# Altium PCB DoorComponantsTest.PcbDoc (part 1 of 2)
Units mil, origin at the board's own origin, x right, y up, seen from the top; angles counter-clockwise.
Board outline 6000 x 4000 mil, 2 copper layers (Top Layer, Bottom Layer); 88 components, 87 nets, 339 pads, 0 vias.
Unrouted connection lines stored in the file: 220.
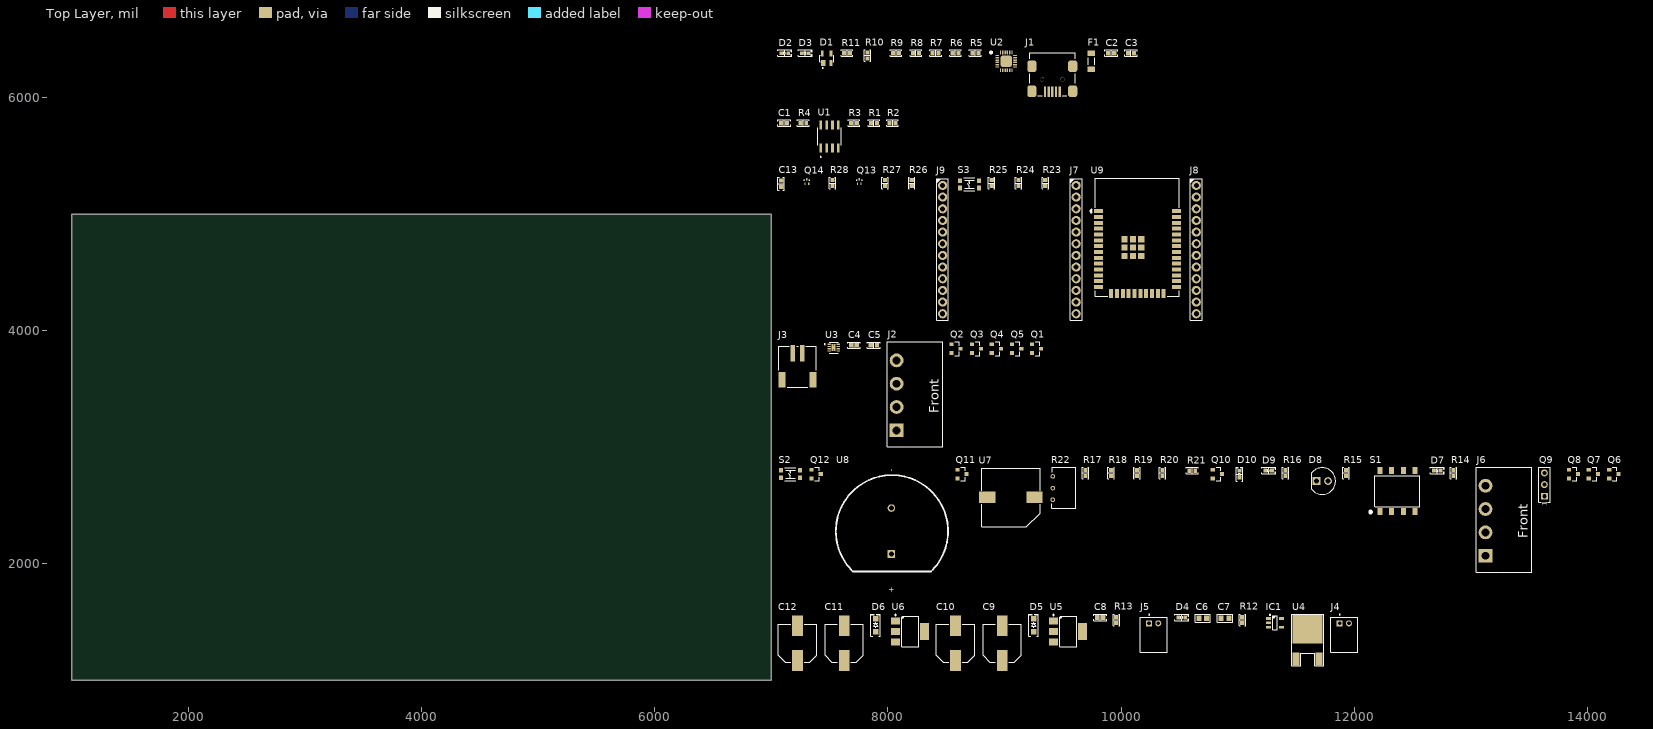
[diagram p0: Top Layer view]
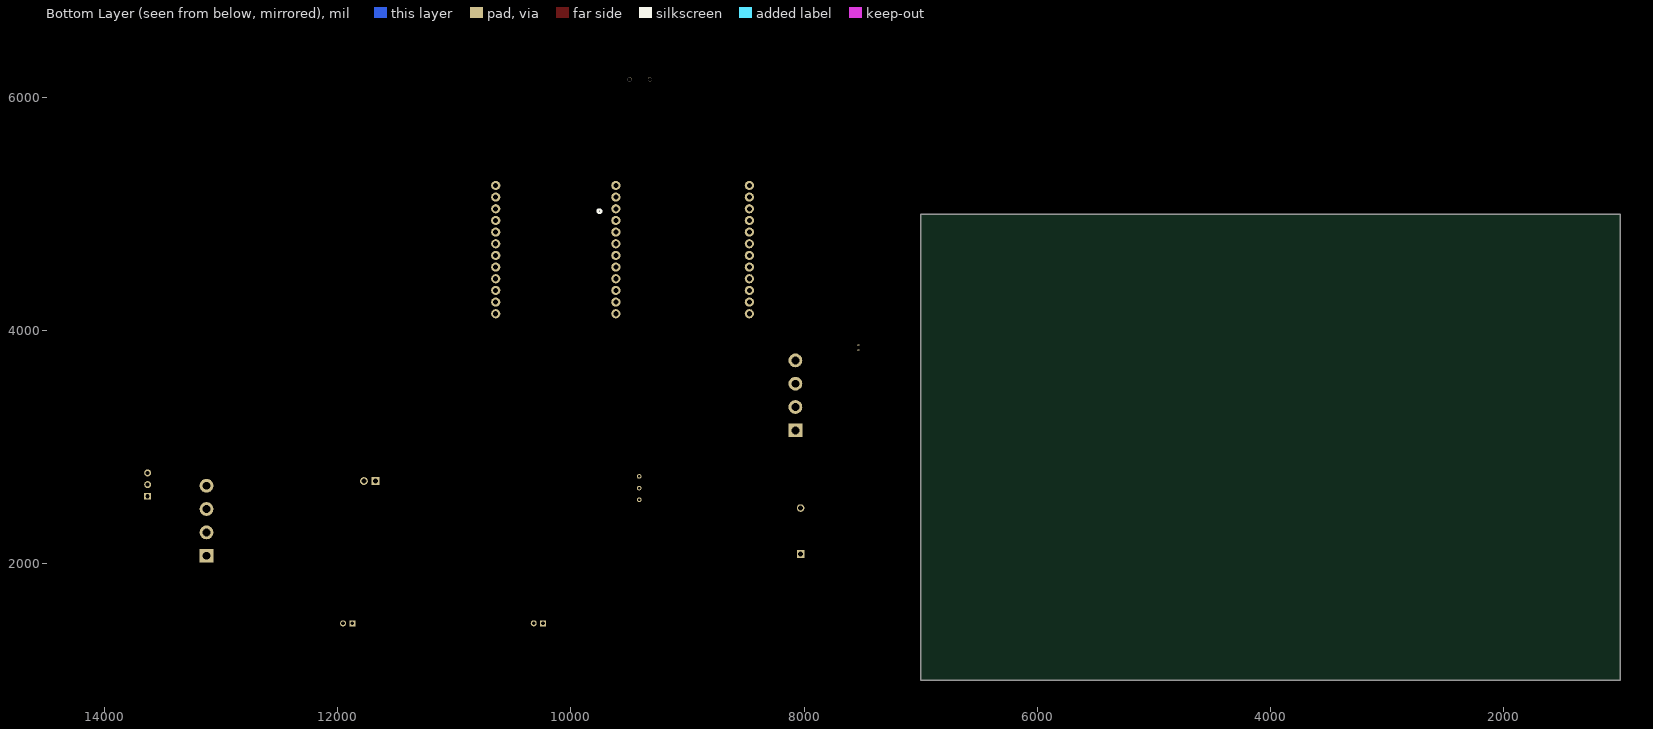
[diagram p1: Bottom Layer view, seen from below]

## Layer stack, top to bottom
Top Solder: solder mask 0.4, Solder Resist, Dk 3.5
Top Layer: signal copper 1.4
Dielectric 1: dielectric 12.6, FR-4, Dk 4.8
Bottom Layer: signal copper 1.4
Bottom Solder: solder mask 0.4, Solder Resist, Dk 3.5

## Board outline
1000,1000 7000,1000 7000,5000 1000,5000

## Design rules (kind name [scope] priority, off if disabled: settings)
Clearance [All] p1: gap=10 ignorepadtopadclearanceinfootprint=FALSE except(0: Arc-Hole Track-Hole SMDPad-Hole THPad-Hole Via-Hole Fill-Hole Poly-Hole Region-Hole Text-Hole)
PolygonConnect [All] p1: connectstyle=Relief reliefconductorwidth=10 reliefentries=4 polygonreliefangle="90 Angle" airgapwidth=10
RoomDefinition USB-UART [InComponentClass('USB-UART')] p1: confinementstyle=ConfineIn formatcopy=TRUE lockcomponents=FALSE outline 7045,5970 10155,5970 10155,6520 7045,6520
RoomDefinition NFC [InComponentClass('NFC')] p2: confinementstyle=ConfineIn formatcopy=TRUE lockcomponents=FALSE outline 7045,5475 8115,5475 8115,5920 7045,5920
RoomDefinition MCU [InComponentClass('MCU')] p3: confinementstyle=ConfineIn formatcopy=TRUE lockcomponents=FALSE outline 7045,4065 10720,4065 10720,5425 7045,5425
RoomDefinition DriveMoteur [InComponentClass('DriveMoteur')] p4: confinementstyle=ConfineIn formatcopy=TRUE lockcomponents=FALSE outline 7045,2995 9345,2995 9345,4015 7045,4015
RoomDefinition "Buzzer, LED, Infrarrouge" [InComponentClass('Buzzer, LED, Infrarrouge')] p5: confinementstyle=ConfineIn formatcopy=TRUE lockcomponents=FALSE outline 7045,1730 14295,1730 14295,2940 7045,2940
RoomDefinition Alimentation [InComponentClass('Alimentation')] p6: confinementstyle=ConfineIn formatcopy=TRUE lockcomponents=FALSE outline 7045,1060 12050,1060 12050,1680 7045,1680
RoutingVias [All] p1: holewidth=28 width=50 viastyle="Through Hole" minholewidth=28 minwidth=50 maxholewidth=28 maxwidth=50
SolderMaskExpansion [All] p1: expansion=4 istentingtop=FALSE
Width [All] p1: maxlimit=10 minlimit=10 preferedwidth=10
30 further rules are at their usual default settings.

## Classes and differential pairs
component class USB-UART: C2 C3 D1 D2 D3 F1 J1 R5 R6 R7 R8 R9 R10 R11 U2
component class NFC: C1 R1 R2 R3 R4 U1
component class MCU: C13 J7 J8 J9 Q13 Q14 R23 R24 R25 R26 R27 R28 R29 S3 U9
component class DriveMoteur: C4 C5 J2 J3 JH1 Q1 Q2 Q3 Q4 Q5 U3
component class "Buzzer, LED, Infrarrouge": D7 D8 D9 D10 J6 JH2 Q6 Q7 Q8 Q9 Q10 Q11 Q12 R14 R15 R16 R17 R18 R19 R20 R21 R22 S1 S2 U7 U8
component class Alimentation: C6 C7 C8 C9 C10 C11 C12 D4 D5 D6 IC1 J4 J5 R12 R13 U4 U5 U6

## Components (designator, comment, footprint, x,y, rotation, side; value= is the part's Value field where it differs from the comment)
C1 "0.1 µF" "CAP 0603_1608" 7110,5780 r0 top
C2 "0.1 µF" "CAP 0603_1608" 9915,6380 r0 top
C3 "0.1 µF" "CAP 0603_1608" 10085,6380 r0 top
C4 "0.1 µF" "CAP 0603_1608" 7710,3875 r0 top
C5 "0.1 µF" "CAP 0603_1608" 7880,3875 r0 top
C6 "1uF 35V" "0603 X7R" 10700,1535 r0 top value=1uF
C7 "1uF 35V" "0603 X7R" 10890,1535 r0 top value=1uF
C8 "10 µF" "CAP 0603_1608" 9820,1540 r0 top
C9 "100 µF" "CAP ALSMD 8.3MM H10.5MM" 8980,1320 r90 top
C10 "100 µF" "CAP ALSMD 8.3MM H10.5MM" 8580,1320 r90 top
C11 "100 µF" "CAP ALSMD 8.3MM H10.5MM" 7625,1320 r90 top
C12 "100 µF" "CAP ALSMD 8.3MM H10.5MM" 7225,1320 r90 top
C13 "0.1 µF" "CAP 0603_1608" 7085,5260 r90 top
D1 "TVS Diode 5.5V" "TVS Diode 5.5V-Footprint-1" 7475,6335 r0 top
D2 "Red" "LED 0603_1608 RED" 7115,6380 r0 top
D3 "Yellow" "LED 0603_1608 YELLOW" 7290,6380 r0 top
D4 "White" "LED 0603_1608" 10520,1540 r0 top
D5 "1N4007FLTR" SOD123F 9250,1475 r90 top
D6 "1N4007FLTR" SOD123F 7895,1475 r90 top
D7 "Red" "LED 0603_1608 RED" 12710,2800 r0 top
D8 "TSAL6100" TSAL6100 11725,2710 r0 top
D9 "Green" "LED 0603_1608 GREEN" 11265,2800 r0 top
D10 "Blue" "LED 0603_1608 BLUE" 11015,2770 r90 top
F1 "Fuse 500mA" "FUSE 1206_3216 0.6MM" 9745,6310 r90 top
IC1 "MCP73831T-2ATI/OT" "MICROCHIP SOT-23-5 OT" 11320,1495 r0 top
J1 "10033526-N3212LF" "FCI USB 10033526-N3212LF" 9410,6200 r0 top
J2 "CONN 4P 5mm HDR" "CONN 4P 5mm HDR-Footprint-1" 8075,3145 r90 top
J3 "S2B-PH-SM4-TB(LF)(SN)" S2B-PH-SM4-TB_LF__SN 7225,3690 r0 top
J4 "JST 2P 2mm R/A" "JST 2P 2mm R_A-Footprint-1" 11875,1490 r0 top
J5 "JST 2P 2mm R/A" "JST 2P 2mm R_A-Footprint-1" 10240,1490 r0 top
J6 "CONN 4P 5mm HDR" "CONN 4P 5mm HDR-Footprint-1" 13125,2070 r90 top
J7 "M20-7821242" "HARWIN M20-7821245" 9615,4695 r0 top
J8 "M20-7821242" "HARWIN M20-7821245" 10645,4695 r0 top
J9 "M20-7821242" "HARWIN M20-7821245" 8470,4695 r0 top
Q1 "TRANS N-CHANNEL 30V 5.8A SOT23" SOT-23 9275,3845 r0 top
Q2 "TRANS N-CHANNEL 30V 5.8A SOT23" SOT-23 8585,3845 r0 top
Q3 "TRANS N-CHANNEL 30V 5.8A SOT23" SOT-23 8760,3845 r0 top
Q4 "TRANS N-CHANNEL 30V 5.8A SOT23" SOT-23 8930,3845 r0 top
Q5 "TRANS N-CHANNEL 30V 5.8A SOT23" SOT-23 9105,3845 r0 top
Q6 "TRANS N-CHANNEL 30V 5.8A SOT23" SOT-23 14225,2770 r0 top
Q7 "TRANS N-CHANNEL 30V 5.8A SOT23" SOT-23 14050,2770 r0 top
Q8 "TRANS N-CHANNEL 30V 5.8A SOT23" SOT-23 13880,2770 r0 top
Q9 "IR Sensor TSOP38338" "Header 1x3 100 mils" 13630,2580 r90 top
Q10 "TRANS N-CHANNEL 30V 5.8A SOT23" SOT-23 10825,2770 r0 top
Q11 "TRANS N-CHANNEL 30V 5.8A SOT23" SOT-23 8635,2770 r0 top
Q12 "TRANS N-CHANNEL 30V 5.8A SOT23" SOT-23 7385,2770 r0 top
Q13 "MMBT2222AM3T5G" "ON SEMI SOT-723" 7755,5280 r90 top
Q14 "MMBT2222AM3T5G" "ON SEMI SOT-723" 7305,5280 r90 top
R1 "4.7 kOhms" "RES 0603_1608" 7880,5780 r0 top
R2 "1 kOhms" "RES 0603_1608" 8040,5780 r0 top
R3 "1 kOhms" "RES 0603_1608" 7710,5780 r0 top
R4 "4.7 kOhms" "RES 0603_1608" 7275,5780 r0 top
R5 "1 kOhms" "RES 0603_1608" 8750,6380 r0 top
R6 "22.1 kOhms" "RES 0603_1608" 8580,6380 r0 top
R7 "NA" "RES 0603_1608" 8410,6380 r0 top
R8 "1 kOhms" "RES 0603_1608" 8240,6380 r0 top
R9 "1 kOhms" "RES 0603_1608" 8070,6380 r0 top
R10 "NA" "RES 0603_1608" 7825,6360 r90 top
R11 "47 kOhms" "RES 0603_1608" 7650,6380 r0 top
R12 "1 kOhms" "RES 0603_1608" 11040,1520 r90 top
R13 "4.7 kOhms" "RES 0603_1608" 9960,1520 r90 top
R14 "470 Ohms" "RES 0603_1608" 12850,2780 r90 top
R15 "470 Ohms" "RES 0603_1608" 11930,2780 r90 top
R16 "470 Ohms" "RES 0603_1608" 11410,2780 r90 top
R17 "10 kOhms" "RES 0603_1608" 9695,2780 r90 top
R18 "10 kOhms" "RES 0603_1608" 9915,2780 r90 top
R19 "NA" "RES 0603_1608" 10135,2780 r90 top
R20 "NA" "RES 0603_1608" 10355,2780 r90 top
R21 "NA" "RES 0603_1608" 10610,2800 r0 top
R22 "POT 10K" POT_TH 9415,2650 r90 top value=10K
R23 "100 kOhms" "RES 0603_1608" 9350,5265 r90 top
R24 "10 kOhms" "RES 0603_1608" 9120,5265 r90 top
R25 "100 kOhms" "RES 0603_1608" 8890,5265 r90 top
R26 "NA" "RES 0603_1608" 8205,5265 r90 top
R27 "10 kOhms" "RES 0603_1608" 7975,5265 r90 top
R28 "10 kOhms" "RES 0603_1608" 7525,5265 r90 top
S1 "Dip Switch 4P" "DIP SWITCH, SPST, 2.54 PITCH, FL" 12220,2450 r0 top
S2 "KMR741NG ULC LFS" "C&K KMR7" 7165,2770 r0 top
S3 "KMR741NG ULC LFS" "C&K KMR7" 8700,5255 r0 top
U1 "M24SR64-YMN6T/2" SOIC127P600X175-8N 7500,5665 r90 top
U2 "USB-UART CP2102N" "CP2102N USB-UART" 9015,6310 r0 top
U3 "DRV8837CDSGT" SON50P200X200X80-9N 7535,3855 r0 top
U4 "LDO 5V 1.5A" "LDO 5V 1.5A" 11600,1440 r0 top
U5 "LD1117S33TR" "ST SOT-223" 9545,1420 r0 top
U6 "LD1117S33TR" "ST SOT-223" 8190,1420 r0 top
U7 "CT-1205H-SMT-TR" "CUI CT-1205H-SMT-TR" 9055,2570 r0 top
U8 "Buzzer CEP-1112" "Buzzer CEP-1112-Footprint-1" 8030,2085 r90 top
U9 "ESP32-WROOM-32 (8MB)" "IC38_ESP32-WROOM-32 (8MB)_EXP" 10140,4800 r0 top

## Footprints (in the part's own frame and the unit in brackets; to place one, negate y for a bottom-side part, rotate by r counter-clockwise, add the part's x,y. Pads: shape width x height; smd on the part's side, far side on the other; paste and mask are expansions set on the pad)
"0603 X7R" [mm]
  rect 1.1x1.2 smd: 1(-0.855,0) 2(0.855,0)
  silkscreen extent -1.68,-0.87 1.68,0.87, body extent -0.85,-0.46 0.85,0.46, height 0.89
"Buzzer CEP-1112-Footprint-1" [mm]
  round 1.65 hole 1.1: N(10,0)
  rect 1.65x1.65 hole 1.1: P(0,0)
  silkscreen extent -3.81,-12.34 17.16,12.09, body extent -6.92,-12 17.08,12, height 6.8
"C&K KMR7" [mm] "T-Switch, 4-leads, body 4.2x2.8mm, C&K KMR741NG ULC LFS"
  rect 0.9x1 smd mask+0.1: 1(-2.05,0.8) 2(2.05,0.8) 3(-2.05,-0.8) 4(2.05,-0.8)
  silkscreen extent -1.2,-1.4 1.2,1.4, body extent -2.3,-1.4 2.3,1.4, height 2.5
"CAP 0603_1608" [mm] "Chip Capacitor, 2-Leads, Body 1.60x0.80mm, IPC Medium Density"
  rect 0.9x1 smd: 1(-0.675,0) 2(0.675,0)
  silkscreen extent -1.4,-0.7 1.4,0.7, body extent -0.8,-0.41 0.8,0.41, height 0.82
"CAP ALSMD 8.3MM H10.5MM" [mm] "Aluminum Electrolytic Capacitor, Body 8.30x8.30x10.50mm, IPC Low Density"
  rect 4.55x2.3 smd: 1(-3.8,0) 2(3.8,0)
  silkscreen extent -4.15,-4.15 4.15,4.15, body extent -4.95,-4.15 4.95,4.15, height 10.5
"CONN 4P 5mm HDR-Footprint-1" [mm]
  rect 3x3 hole 1.7: 1(0,0)
  round 3 hole 1.7: 2(5.08,0) 3(10.16,0) 4(15.24,0)
  silkscreen extent -3.56,-10.03 19.3,2.03, body extent -3.56,-10.03 19.3,2.03, height 8.5
"CP2102N USB-UART" [mm]
  rect 0.85x0.3 smd: 1(-1.95,1.25)
  rrect50% 0.85x0.3 smd: 2(-1.95,0.75) 3(-1.95,0.25) 4(-1.95,-0.25) 5(-1.95,-0.75) 6(-1.95,-1.25) 13(1.95,-1.25) 14(1.95,-0.75) 15(1.95,-0.25) 16(1.95,0.25) 17(1.95,0.75) 18(1.95,1.25)
  rrect50% 0.3x0.85 smd: 7(-1.25,-1.95) 8(-0.75,-1.95) 9(-0.25,-1.95) 10(0.25,-1.95) 11(0.75,-1.95) 12(1.25,-1.95) 19(1.25,1.95) 20(0.75,1.95) 21(0.25,1.95) 22(-0.25,1.95) 23(-0.75,1.95) 24(-1.25,1.95)
  rrect50% 2.55x2.55 smd: 25(0,0)
  silkscreen extent -3.43,1.78 -3.17,2.03, body extent -2,-2 2,2, height 0.8
"CUI CT-1205H-SMT-TR" [mm] "Buzzer 12.8x12.8mm"
  rect 3.5x2.5 smd: +(-5.15,0) -(5.15,0)
  silkscreen extent -6.4,-6.4 6.4,6.4, body extent -6.9,-6.4 6.9,6.4, height 10
"DIP SWITCH, SPST, 2.54 PITCH, FL" [mm]
  rect 1.1x1.5 smd: 1(0,0) 2(2.54,0) 3(5.08,0) 4(7.62,0) 5(7.62,8.9) 6(5.08,8.9) 7(2.54,8.9) 8(0,8.9)
  silkscreen extent -2.16,-0.25 8.68,7.73, body extent -1.64,-0.63 9.52,9.27, height 3.99
"FCI USB 10033526-N3212LF" [mm] "USB 2.0 Type B Mini"
  rect 0.5x2.25 smd: 1(1.6,-3.826) 2(0.8,-3.826) 3(0,-3.826) 4(-0.8,-3.826) 5(-1.6,-3.826)
  round 0.9 hole 0.9 unplated: M(-2.2,-1.151) M(2.2,-1.151)
  rrect50% 2x2.5 smd: S(-4.45,-3.731) S(-4.45,1.719) S(4.45,-3.731) S(4.45,1.719)
  silkscreen extent -4.95,-4.71 4.95,4.69, body extent -4.95,-4.7 4.95,4.7, height 4.01
"FUSE 1206_3216 0.6MM" [mm] "Chip Fuse 1.5A AC 63V DC, 2-Leads, Body 3.10x1.55mm, IPC Medium Densitym"
  rect 1.25x1.65 smd: 1(-1.725,0) 2(1.725,0)
  silkscreen extent -0.8,-0.72 0.8,0.72, body extent -1.55,-0.77 1.55,0.78, height 0.76
"HARWIN M20-7821245" [mm] "2.54mm DIL PC TAIL PIN HEADER ASSEMBLY"
  round 2 hole 1.1: 1(0,13.97) 2(0,11.43) 3(0,8.89) 4(0,6.35) 5(0,3.81) 6(0,1.27) 7(0,-1.27) 8(0,-3.81) 9(0,-6.35) 10(0,-8.89) 11(0,-11.43) 12(0,-13.97)
  silkscreen extent -1.27,-15.4 1.27,15.43, body extent -1.25,-15.44 1.25,15.44, height 8.5
"Header 1x3 100 mils" [mm]
  rect 1.5x1.5 hole 0.9: 1(0,0)
  round 1.5 hole 0.9: 2(2.54,0) 3(5.08,0)
  silkscreen extent -1.27,-1.27 6.35,1.27, body extent -0.38,-3.4 5.4,1.4, height 10.16
"IC38_ESP32-WROOM-32 (8MB)_EXP" [mil]
  rect 79x35 smd paste+0 mask+0: 1(-334.65,224.56) 2(-334.65,174.56) 3(-334.65,124.56) 4(-334.65,74.56) 5(-334.65,24.56) 6(-334.65,-25.44) 7(-334.65,-75.44) 8(-334.65,-125.44) 9(-334.65,-175.44) 10(-334.65,-225.44) 11(-334.65,-275.44) 12(-334.65,-325.44) 13(-334.65,-375.44) 14(-334.65,-425.44) 25(334.65,-425.44) 26(334.65,-375.44) 27(334.65,-325.44) 28(334.65,-275.44) 29(334.65,-225.44) 30(334.65,-175.44) 31(334.65,-125.44) 32(334.65,-75.44) 33(334.65,-25.44) 34(334.65,24.56) 35(334.65,74.56) 36(334.65,124.56) 37(334.65,174.56) 38(334.65,224.56)
  rect 35x79 smd: 15(-225,-482.19) 16(-175,-482.19) 17(-125,-482.19) 18(-75,-482.19) 19(-25,-482.19) 20(25,-482.19) 21(75,-482.19) 22(125,-482.19) 23(175,-482.19) 24(225,-482.19)
  rect 52x52 smd: 39(-111.78,-15.96) 40(-39.54,-15.96) 41(32.71,-15.96) 42(-111.78,-88.2) 43(-39.54,-88.2) 44(32.71,-88.2) 45(-111.78,-160.44) 46(-39.54,-160.44) 47(32.71,-160.44)
  silkscreen extent -400,-507 360,507, body extent 0,0 10,10, height 10
"JST 2P 2mm R_A-Footprint-1" [mm]
  rect 1.308x1.308 / inner round 1.308 / far side rect 1.308x1.308 hole 0.8: 1(0,0)
  round 1.308 hole 0.8: 2(2,0)
  silkscreen extent -1.95,-6.25 3.95,2, body extent -1.95,-6.22 3.95,1.38, height 4.8
"LDO 5V 1.5A" [mm] "IC REG LINEAR 5V 1.5A DPAK"
  rect 1.5x2.8 smd: 1(-2.5,-6.5) 3(2.5,-6.5)
  rect 6.5x6.2 smd: 2(0,0)
  silkscreen extent -3.5,-8 3.5,3.25
"LED 0603_1608" [mm] "Chip Diode, 2-Leads, Body 1.60x0.80mm, IPC Medium Density"
  rect 0.8x0.8 smd: 1(-0.75,0) 2(0.75,0)
  silkscreen extent -1.52,-0.7 1.52,0.7, body extent -0.8,-0.4 0.8,0.4, height 0.53
"LED 0603_1608 BLUE" [mm] "Chip Diode, 2-Leads, Body 1.60x0.80mm, IPC Medium Density"
  rect 0.8x0.8 smd: 1(-0.75,0) 2(0.75,0)
  silkscreen extent -1.52,-0.7 1.52,0.7, body extent -0.8,-0.4 0.8,0.4, height 0.53
"LED 0603_1608 GREEN" [mm] "Chip Diode, 2-Leads, Body 1.60x0.80mm, IPC Medium Density"
  rect 0.8x0.8 smd: 1(-0.75,0) 2(0.75,0)
  silkscreen extent -1.52,-0.7 1.52,0.7, body extent -0.8,-0.4 0.8,0.4, height 0.53
"LED 0603_1608 RED" [mm] "Chip Diode, 2-Leads, Body 1.60x0.80mm, IPC Medium Density"
  rect 0.8x0.8 smd: 1(-0.75,0) 2(0.75,0)
  silkscreen extent -1.52,-0.7 1.52,0.7, body extent -0.8,-0.4 0.8,0.4, height 0.53
"LED 0603_1608 YELLOW" [mm] "Chip Diode, 2-Leads, Body 1.60x0.80mm, IPC Medium Density"
  rect 0.8x0.8 smd: 1(-0.75,0) 2(0.75,0)
  silkscreen extent -1.52,-0.7 1.52,0.7, body extent -0.8,-0.4 0.8,0.4, height 0.53
"MICROCHIP SOT-23-5 OT" [mm] "SOT23, 5-Leads, Body 2.90x2.70mm, Pitch 0.95mm, IPC Medium Density"
  rect 1.1x0.6 smd: 1(-1.4,0.95) 2(-1.4,0) 3(-1.4,-0.95) 4(1.4,-0.95) 5(1.4,0.95)
  silkscreen extent -1.22,-1.5 0.5,1.85, body extent -1.36,-1.45 1.36,1.45, height 1.19
"ON SEMI SOT-723" [mm] "SOT-723, 3-Leads, Body 0.8x1.20mm, Pitch 0.40mm, IPC Medium Density"
  rect 0.52x0.27 smd: 1(-0.49,0.4) 3(-0.49,-0.4)
  rect 0.52x0.36 smd: 2(0.49,0)
  silkscreen extent 0.1,-0.6 0.4,0.6, body extent -0.6,-0.6 0.6,0.6, height 0.55
POT_TH [mm] "Bourns 3352"
  round 1 hole 0.55: 1(-2.54,0) 2(0,0) 3(2.54,0)
  silkscreen extent -4.37,-4.97 4.51,0.27, body extent -4.36,-4.98 4.52,0.22, height 9.65
"RES 0603_1608" [mm] "Chip Resistor, 2-Leads, Body 1.60x0.80mm, IPC Medium Density"
  rect 0.85x0.95 smd: 1(-0.65,0) 2(0.65,0)
  silkscreen extent -1.27,-0.7 1.27,0.7, body extent -0.8,-0.4 0.8,0.4, height 0.45
S2B-PH-SM4-TB_LF__SN [mil]
  rect 39x138 smd paste+0 mask+0: 1(-39.37,116.35) 2(39.37,116.35)
  rect 59x134 smd: 3(-131.89,-110.03) 4(131.89,-110.03)
  silkscreen extent -160,-174 160,174, body extent 0,0 10,10, height 10
SOD123F [mm] "SODFL, 2-Leads, Body 1.60x3.50mm, IPC Medium Density"
  rect 1.2x1.2 smd: 1(-1.43,0) 2(1.43,0)
  silkscreen extent -2.41,-1.02 2.41,1.02, body extent -1.75,-0.8 1.75,0.8, height 1.1
SOIC127P600X175-8N [mm]
  rrect25% 1.97x0.6 smd: 1(-2.475,1.905) 2(-2.475,0.635) 3(-2.475,-0.635) 4(-2.475,-1.905) 5(2.475,-1.905) 6(2.475,-0.635) 7(2.475,0.635) 8(2.475,1.905)
  silkscreen extent -4.54,-2.52 1.95,2.52, body extent -3,-2.45 3,2.45, height 1.75
SON50P200X200X80-9N [mm]
  rrect25% 0.74x0.28 smd: 1(-0.985,0.75) 2(-0.985,0.25) 3(-0.985,-0.25) 4(-0.985,-0.75) 5(0.985,-0.75) 6(0.985,-0.25) 7(0.985,0.25) 8(0.985,0.75)
  rect 0.9x1.6 smd paste-2: 9(0,0)
  round 0.4 hole 0.2 mask+0: 9_1(0,0.55) 9_2(0,-0.55)
  silkscreen extent -2.02,-1.21 1,1.21, body extent -1,-1 1,1, height 0.8
SOT-23 [mm]
  rect 0.9x0.8 smd: 1(-1,0.95) 2(-1,-0.95) 3(1,0)
  silkscreen extent -0.28,-1.5 0.7,1.5, body extent -0.7,-1.52 0.7,1.52, height 1.12
"ST SOT-223" [mm] "SOT223, 4-Leads, Body 6.50x7.00mm (avg), Pitch 2.30mm, IPC Medium Density"
  rect 2x1.5 smd: 1(-3.15,2.3) 2(-3.15,0) 3(-3.15,-2.3)
  rect 2x3.8 smd: 4(3.15,0)
  silkscreen extent -3.27,-3.35 1.85,3.72, body extent -3.52,-3.25 3.5,3.25, height 1.8
TSAL6100 [mm]
  rect 1.7x1.7 hole 1.1 paste-1000 mask+0: 1(-1.27,0)
  round 1.7 hole 1.1 paste-1000 mask+0: 2(1.27,0)
  silkscreen extent -2.29,-2.9 2.9,2.9, body extent -3.08,-3.08 3.08,3.08, height 0.25
"TVS Diode 5.5V-Footprint-1" [mm]
  rrect15% 0.99x1.3 smd: 1(-0.76,-1.025)
  rrect15% 0.59x1.3 smd: 2(0.96,-1.025) 3(0.96,1.025) 4(-0.96,1.025)
  silkscreen extent -1.52,-2.2 1.52,0.7, body extent -1.46,-1.18 1.46,1.19, height 1.22

## Part data
C1 C2 C3 C4 C5 C13: library part C0603C104K5RAC7411, "CAP CER 0.1UF 50V X7R 0603", Device Package="0603 (1608 Metric)", manufacturer=KEMET, Operating Temperature="-55°C ~ 125°C", Supplier Part Number 1=399-C0603C104K5RAC7411CT-ND, Temperature Coefficient=X7R, Tolerance=±10%, Voltage - Rated=50V, Applications="Bypass, Decoupling", Capacitance="0.1 µF", componentlink1description=Datasheet, componentlink1url=https://api.kemet.com/component-edge/download/datasheet/C0603C104K5RAC7411.pdf, componentlink2description="DigiKey Link", componentlink2url=https://www.digikey.com/en/products/detail/kemet/C0603C104K5RAC7411/3317013, lastupdated="2023-03-28 19:09:05", Lifecycle Status=Active, Minimum Order=1, Mounting Type="Surface Mount, MLCC", Package / Case="0603 (1608 Metric)", packaging=TapeAndReel, Part Number=C0603C104K5RAC7411, Part Status=Active, partid=2233, price=0.01, series="SMD Comm X7R", Size / Dimension="0.063\" L x 0.031\" W (1.60mm x 0.80mm)", Supplier 1=DigiKey, Thickness (Max)="0.035\" (0.90mm)"
C6 C7: library part CMP-048-000033-3, "1µF ±10% 35V Ceramic Capacitor X7R 0603 (1608 Metric)", manufacturer="Taiyo Yuden", Manufacturer Part Number=GMJ107CB7105MAHR, Volt=35V, Design Item ID="1uF 35V X7R", Source=IC_Cap.SchLib, Tri=1000000, Verifier="Maxim Ayotte"
C8: library part GRT188R61C106ME13D, "CAP CER 10UF 16V X5R 0603", Device Package="0603 (1608 Metric)", manufacturer="Murata Electronics", Operating Temperature="-55°C ~ 85°C", Ratings=AEC-Q200, Supplier Part Number 1=490-12318-1-ND, Temperature Coefficient=X5R, Tolerance=±20%, Voltage - Rated=16V, Applications=Automotive, Capacitance="10 µF", componentlink1description=Datasheet, componentlink1url=https://search.murata.co.jp/Ceramy/image/img/A01X/G101/ENG/GRT188R61C106ME13-01.pdf, componentlink2description="DigiKey Link", componentlink2url=https://www.digikey.com/en/products/detail/murata-electronics/GRT188R61C106ME13D/5416740, lastupdated="2023-03-28 19:09:04", Lifecycle Status=Active, Minimum Order=1, Mounting Type="Surface Mount, MLCC", Package / Case="0603 (1608 Metric)", packaging=TapeAndReel, Part Number=GRT188R61C106ME13D, Part Status=Active, partid=2515, price=0.06, series=GRT, Size / Dimension="0.063\" L x 0.031\" W (1.60mm x 0.80mm)", Supplier 1=DigiKey, Thickness (Max)="0.035\" (0.90mm)"
C9 C10 C11 C12: library part UCD1V101MNL1GS, "CAP ALUM 100UF 20% 35V SMD", Device Package="Radial, Can - SMD", Lifetime @ Temp.="5000 Hrs @ 105°C", manufacturer=Nichicon, Operating Temperature="-55°C ~ 105°C", Ratings=AEC-Q200, Ripple Current @ High Frequency="600 mA @ 100 kHz", Ripple Current @ Low Frequency="300 mA @ 120 Hz", Supplier Part Number 1=493-6186-1-ND, Tolerance=±20%, Voltage - Rated="35 V", Applications=Automotive, Capacitance="100 µF", componentlink1description=Datasheet, componentlink1url=http://nichicon-us.com/english/products/pdfs/e-ucd.pdf, componentlink2description="DigiKey Link", componentlink2url=https://www.digikey.com/en/products/detail/nichicon/UCD1V101MNL1GS/3439293, Height - Seated (Max)="0.413\" (10.50mm)", Impedance="160 mOhms", lastupdated="2023-03-28 20:09:46", Lifecycle Status=Active, Minimum Order=1, Mounting Type="Surface Mount", Package / Case="Radial, Can - SMD", packaging=TapeAndReel, Part Number=UCD1V101MNL1GS, Part Status=Active, partid=7455, Polarization=Polar, price=0.15, series=UCD, Size / Dimension="0.315\" Dia (8.00mm)", Supplier 1=DigiKey, Surface Mount Land Size="0.327\" L x 0.327\" W (8.30mm x 8.30mm)"
D1: library part CMP-00082-2, "8.5V Clamp Ipp Tvs Diode Surface Mount SOT-143-4", Manufacturer Part Number 1=SP0503BAHTG
D2: library part BL-HUB36A-AV-TRB, "0603 RED", Current - Test=20mA, Device Package="0603 (1608 Metric)", Lens Color=Colorless, manufacturer="American Bright Optoelectronics Corporation", Millicandela Rating=94mcd, Supplier Device Package=0603, Supplier Part Number 1=BL-HUB36A-AV-TRBCT-ND, Voltage - Forward (Vf) (Typ)=2.2V, Color=Red, componentlink1description=Datasheet, componentlink1url=https://americanbrightled.com/pdffiles/smt/BL-HUB36A-AV-TRB.pdf, componentlink2description="DigiKey Link", componentlink2url=https://www.digikey.com/en/products/detail/american-bright-optoelectronics-corporation/BL-HUB36A-AV-TRB/9678174, Configuration=Standard, Height (Max)=0.70mm, lastupdated="2023-03-27 19:53:19", Lens Style="Rectangle with Flat Top", Lens Transparency=Clear, Lifecycle Status=Active, Minimum Order=1, Mounting Type="Surface Mount", Package / Case="0603 (1608 Metric)", packaging=TapeAndReel, Part Number=BL-HUB36A-AV-TRB, Part Status=Active, partid=1020, price=0.04, series=-, Size / Dimension="1.60mm L x 0.80mm W", Supplier 1=DigiKey, Viewing Angle=120°, Wavelength - Dominant=632nm, Wavelength - Peak=645nm
D3: library part BL-HKC36D-AV-TRB, "0603 YELLOW", Current - Test=20mA, Device Package="0603 (1608 Metric)", Lens Color=Colorless, manufacturer="American Bright Optoelectronics Corporation", Millicandela Rating=120mcd, Supplier Device Package=0603, Supplier Part Number 1=BL-HKC36D-AV-TRBCT-ND, Voltage - Forward (Vf) (Typ)=2V, Color=Yellow, componentlink1description=Datasheet, componentlink1url=http://americanbrightled.com/pdffiles/smt/BL-HKC36D-AV-TRB.pdf, componentlink2description="DigiKey Link", componentlink2url=https://www.digikey.com/en/products/detail/american-bright-optoelectronics-corporation/BL-HKC36D-AV-TRB/9678175, Configuration=0603, Height (Max)=0.85mm, lastupdated="2023-03-27 19:54:01", Lens Size="0.87mm x 0.80mm", Lens Style="Rectangle with Flat Top", Lens Transparency=Clear, Lifecycle Status=Active, Minimum Order=1, Mounting Type="Surface Mount", Package / Case="0603 (1608 Metric)", packaging=TapeAndReel, Part Number=BL-HKC36D-AV-TRB, Part Status=Active, partid=82, price=0.04, series=-, Size / Dimension="1.60mm L x 0.80mm W", Supplier 1=DigiKey, Viewing Angle=120°, Wavelength - Dominant=589nm, Wavelength - Peak=590nm
D4: library part 5973905607F, "LED WHITE 0603 SMD", Current - Test=5mA, Device Package="0603 (1608 Metric)", Lens Color=0.45mm, manufacturer=Dialight, Supplier Device Package=0603, Supplier Part Number 1=350-4395-1-ND, Voltage - Forward (Vf) (Typ)=2.925V, Color=White, componentlink2description="DigiKey Link", componentlink2url=https://www.digikey.com/en/products/detail/dialight/5973905607F/9385450, Configuration=Standard, Height (Max)=0.45mm, lastupdated="2023-03-27 19:56:28", Lens Size="1.20mm x 0.80mm", Lens Style="Rectangle with Flat Top", Lifecycle Status=Active, Minimum Order=1, Mounting Type="Surface Mount", Package / Case="0603 (1608 Metric)", packaging=TapeAndReel, Part Number=5973905607F, Part Status=Active, partid=883, price=0.09, series=597, Size / Dimension="1.60mm L x 0.80mm W", Supplier 1=DigiKey, Viewing Angle=130°
D5 D6: "STANDARD RECTIFIER 1000V SOD-123", Capacitance @ Vr, F="15pF @ 4V, 1MHz", Current - Average Rectified (Io)=1A, Current - Reverse Leakage @ Vr="5µA @ 1000V", manufacturer="SMC Diode Solutions", Package / Case=SOD-123F, Supplier Device Package=SOD-123FL, Supplier Part Number 1=1655-1N4007FLCT-ND, Voltage - DC Reverse (Vr) (Max)=1000V, Voltage - Forward (Vf) (Max) @ If="1.1V @ 1A", componentlink1description=Datasheet, componentlink1url=http://www.smc-diodes.com/propdf/1N4001FL-1N4007FL%20N1646%20REV.A.pdf, componentlink2description="DigiKey Link", componentlink2url=http://digikey.com/product-detail/en/smc-diode-solutions/1N4007FLTR/1655-1N4007FLCT-ND/11657827, Diode Type=Standard, lastupdated="2020-08-30 20:59:55", Lifecycle Status=Active, Minimum Order=1, Mounting Type="Surface Mount", packaging=TapeAndReel, Part Number=1N4007FLTR, partid=3314, price=0.01, Speed="Standard Recovery >500ns, > 200mA (Io)", Supplier 1=DigiKey
D7: library part 5973005507F, "LED RED 0603 SMD", Current - Test=20mA, Device Package="0603 (1608 Metric)", Lens Color=0.68mm, manufacturer=Dialight, Millicandela Rating=90mcd, Supplier Device Package=0603, Supplier Part Number 1=350-4374-1-ND, Voltage - Forward (Vf) (Typ)=2V, Color=Red, componentlink1description=Datasheet, componentlink1url=http://www.dialightsignalsandcomponents.com/Assets/Drawings/2D_Drawings_DrawingDetailedSpec/NewDrawings/18369A.pdf, componentlink2description="DigiKey Link", componentlink2url=https://www.digikey.com/en/products/detail/dialight/5973005507F/9385429, Configuration=Standard, Height (Max)=0.68mm, lastupdated="2023-03-27 19:53:19", Lens Size="1.20mm x 0.80mm", Lens Style="Rectangle with Flat Top", Lifecycle Status=Active, Minimum Order=1, Mounting Type="Surface Mount", Package / Case="0603 (1608 Metric)", packaging=TapeAndReel, Part Number=5973005507F, Part Status=Active, partid=378, price=0.08, series=597, Size / Dimension="1.60mm L x 0.80mm W", Supplier 1=DigiKey, Wavelength - Dominant=630nm
D8: library part CMP-00123-1, "Infrared (IR) Emitter 940nm 1.35V 100mA 80mW/sr @ 100mA 20° Radial, 5mm Dia (T 1 3/4)", Manufacturer Part Number 1=TSAL6100
D9: library part 5973316507F, "LED GREEN 0603 SMD", Current - Test=20mA, Device Package="0603 (1608 Metric)", Lens Color=1.24mm, manufacturer=Dialight, Millicandela Rating=34mcd, Supplier Device Package=0603, Supplier Part Number 1=350-4373-1-ND, Voltage - Forward (Vf) (Typ)=2V, Color=Green, componentlink1description=Datasheet, componentlink1url=http://www.dialightsignalsandcomponents.com/Assets/Drawings/2D_Drawings_DrawingDetailedSpec/NewDrawings/C18371C.pdf, componentlink2description="DigiKey Link", componentlink2url=https://www.digikey.com/en/products/detail/dialight/5973316507F/9385428, Configuration=Standard, Height (Max)=1.24mm, lastupdated="2023-03-27 19:52:49", Lens Style="Round with Domed Top", Lifecycle Status=Active, Minimum Order=1, Mounting Type="Surface Mount", Package / Case="0603 (1608 Metric)", packaging=TapeAndReel, Part Number=5973316507F, Part Status=Active, partid=587, price=0.13, series=597, Size / Dimension="1.60mm L x 0.80mm W", Supplier 1=DigiKey, Wavelength - Dominant=560nm
D10: library part VLMB1300-GS08, "LED BLUE 0603 SMD", Current - Test=20mA, Device Package="0603 (1608 Metric)", Lens Color=1.00mm, manufacturer="Vishay Semiconductor Opto Division", Millicandela Rating=104mcd, Supplier Device Package=0603, Supplier Part Number 1=VLMB1300-GS08CT-ND, Voltage - Forward (Vf) (Typ)=3.3V, Color=Blue, componentlink1description=Datasheet, componentlink1url=http://www.vishay.com/docs/82437/vlmo1300.pdf, componentlink2description="DigiKey Link", componentlink2url=https://www.digikey.com/en/products/detail/vishay-semiconductor-opto-division/VLMB1300-GS08/3025494, Configuration=Standard, Height (Max)=1.00mm, lastupdated="2023-03-27 19:52:15", Lens Size="1.10mm x 0.80mm", Lens Style="Rectangle with Flat Top", Lifecycle Status=Active, Minimum Order=1, Mounting Type="Surface Mount", Package / Case="0603 (1608 Metric)", packaging=TapeAndReel, Part Number=VLMB1300-GS08, Part Status=Active, partid=785, price=0.06, series=CHIPLED, Size / Dimension="1.60mm L x 0.80mm W", Supplier 1=DigiKey, Viewing Angle=130°, Wavelength - Dominant=470nm, Wavelength - Peak=468nm
F1: library part 3413.0113.22, "FUSE BOARD MNT 500MA 125VAC/VDC", Breaking Capacity @ Rated Voltage=50A, Current Rating (Amps)=500mA, Device Package="1206 (3216 Metric)", manufacturer="Schurter Inc.", Operating Temperature="-55°C ~ 90°C", Supplier Part Number 1=486-1675-1-ND, Voltage Rating - AC=125V, Approval Agency=cURus, Approvals=cURus, componentlink1description=Datasheet, componentlink1url=http://www.schurterinc.com/bundles/snceschurter/epim/_ProdPool_/newDS/en/typ_USF_1206.pdf, componentlink2description="DigiKey Link", componentlink2url=http://digikey.com/product-detail/en/schurter-inc/3413.0113.22/486-1675-1-ND/2870075, Fuse Type="Board Mount (Cartridge Style Excluded)", lastupdated="2020-09-02 01:30:41", Lifecycle Status=Active, Melting I²t=0.02, Minimum Order=1, Mounting Type="Surface Mount", Package / Case="1206 (3216 Metric)", packaging=TapeAndReel, Part Number=3413.0113.22, Part Status=Active, price=0.24, Response Time="Fast Blow", series="USF 1206", Size / Dimension="0.126\" L x 0.063\" W x 0.024\" H (3.20mm x 1.60mm x 0.60mm)", Supplier 1=DigiKey, Voltage Rating - DC=125V
IC1: "IC CONTROLLR LI-ION 4.2V SOT23-5", Battery Pack Voltage=4.2V, Charge Current - Max=500mA, Current - Charging="Constant - Programmable", Device Package="SC-74A, SOT-753", manufacturer="Microchip Technology", Operating Temperature="-40°C ~ 85°C (TA)", Supplier Device Package=SOT-23-5, Supplier Part Number 1=MCP73831T-2ATI/OTTR-ND, Voltage - Supply (Max)=6V, Battery Chemistry="Lithium Ion/Polymer", componentlink1description=Datasheet, componentlink1url=http://ww1.microchip.com/downloads/en/DeviceDoc/20001984g.pdf, componentlink2description="DigiKey Link", componentlink2url=//digikey.com/product-detail/en/microchip-technology/MCP73831T-2ATI-OT/MCP73831T-2ATI-OTTR-ND/964303, Fault Protection="Over Voltage", lastupdated="2019-12-03 23:33:03", Lifecycle Status=0, Minimum Order=1, Mounting Type="Surface Mount", Number of Cells=1, Package / Case="SC-74A, SOT-753", packaging=TapeAndReel, Part Number=MCP73831T-2ATI/OT, Part Status=Active, partid=1, price=0.42, Programmable Features=Current, series=-, Supplier 1=DigiKey
J1: "CONN RCPT MINI USB B 5POS SMD RA", Current Rating (Amps)="1A per Contact", manufacturer="Amphenol ICC (FCI)", Operating Temperature="-25°C ~ 85°C", Supplier Part Number 1=609-4700-2-ND, Voltage - Rated=30V, componentlink1description=Datasheet, componentlink1url=http://www.amphenol-icc.com/media/wysiwyg/files/drawing/10033526.pdf, componentlink2description="DigiKey Link", componentlink2url=//digikey.com/product-detail/en/amphenol-icc-fci/10033526-N3212LF/609-4700-2-ND/4292074, Connector Type="USB - mini B", Features="Board Guide, Solder Retention", Gender=Receptacle, lastupdated="2019-12-09 20:52:14", Lifecycle Status=0, Mating Cycles=5000, Minimum Order=1, Mounting Feature=Horizontal, Mounting Type="Surface Mount, Right Angle", Number of Contacts=5, Number of Ports=1, packaging=TapeAndReel, Part Number=10033526-N3212LF, Part Status=Active, price=0.39, series=-, Shielding=Shielded, Supplier 1=DigiKey, Termination=Solder
J2 J6: library part CMP-068-000025-3, "4 Position Terminal Block Header, Male Pins, Shrouded (4 Side) 0.197\" (5.00mm) 90°, Right Angle Solder", Manufacturer Part Number 1=OSTOQ047151, Supplier Part Number 1=ED2793-ND, Supplier 1=Digi-Key
J3: "No Description Available", Mfr_Name=JST, Copyright="Copyright (C) 2023 Ultra Librarian. All rights reserved.", Manufacturer Part Number 1=S2B-PH-SM4-TB(LF)(SN), RefDes=RefDes, Supplier 1="Arrow Electronics", Supplier Part Number 1=S2B-PH-SM4-TB(LF)(SN), Type=DEV
J4 J5: library part CMP-00129-1, "Connector Header Through Hole, Right Angle 2 position 0.079\" (2.00mm)", Manufacturer Part Number 1=S2B-PH-K-S(LF)(SN)
J7 J8 J9: "CONN RCPT 12POS 0.1 GOLD PCB", Current Rating (Amps)=3A, Insulation Color=Black, manufacturer="Harwin Inc.", Material Flammability Rating="UL94 V-0", Operating Temperature="-40°C ~ 105°C", Supplier Part Number 1=952-1852-ND, componentlink1description=Datasheet, componentlink1url=https://cdn.harwin.com/pdfs/C001XX_M20_Series_Connectors.pdf, componentlink2description="DigiKey Link", componentlink2url=http://digikey.com/product-detail/en/harwin-inc/M20-7821242/952-1852-ND/3727819, Connector Type=Receptacle, Contact Finish - Mating=Gold, Contact Finish - Post=Tin, Contact Finish Thickness - Mating=Flash, Contact Type="Female Socket", Fastening Type=Push-Pull, lastupdated="2022-09-21 18:59:31", Lifecycle Status=Active, Mated Stacking Heights="11.04mm, 12.63mm", Minimum Order=5004, Mounting Type="Through Hole", Number of Positions=12, Number of Positions Loaded=All, Number of Rows=1, packaging=Tube, Part Number=M20-7821242, Part Status=Active, price=0.74, series=M20, Style="Board to Board or Cable", Supplier 1=DigiKey, Termination=Solder
Q1 Q2 Q3 Q4 Q5 Q6 Q7 Q8 Q10 Q11 Q12: library part CMP-045-000020-1, "N-Channel 5.8A (Tj) 350mW Surface Mount SOT-23", Manufacturer Part Number=SI3404-TP, Design Item ID="TRANS N-CHANNEL 30V 5.8A SOT23", Source=IC_Component.SchLib, Supplier 1=Digi-Key
Q9: library part CMP-00005-5, "Ir Remote Receiver 38KHZ 45M 3-PIN", Manufacturer Part Number 1=TSOP38338
Q13 Q14: "TRANS NPN 40V 0.6A SOT-723", Current - Collector (Ic) (Max)=600mA, Current - Collector Cutoff (Max)="10nA (ICBO)", DC Current Gain (hFE) (Min) @ Ic, Vce="100 @ 150mA, 10V", Frequency - Transition=300MHz, manufacturer="ON Semiconductor", Operating Temperature="-55°C ~ 150°C (TJ)", Package / Case=SOT-723, Power - Max=640mW, Supplier Part Number 1=MMBT2222AM3T5GOSCT-ND, Voltage - Collector Emitter Breakdown (Max)=40V, componentlink1description=Datasheet, componentlink1url=http://www.onsemi.com/pub/Collateral/MMBT2222AM3-D.PDF, componentlink2description="DigiKey Link", componentlink2url=http://digikey.com/product-detail/en/on-semiconductor/MMBT2222AM3T5G/MMBT2222AM3T5GOSCT-ND/3487571, lastupdated="2023-03-28 20:16:11", Lifecycle Status=Active, Minimum Order=1, Mounting Type="Surface Mount", packaging=TapeAndReel, Part Number=MMBT2222AM3T5G, Part Status=Active, partid=22, price=0.03, series=-, Supplier 1=DigiKey, Supplier Device Package=SOT-723, Transistor Type=NPN, Vce Saturation (Max) @ Ib, Ic="1V @ 50mA, 500mA"
R1 R4: library part CRGP0603F4K7, "RES 4.7K OHM 1% 1/4W 0603", Device Package="0603 (1608 Metric)", manufacturer="TE Connectivity Passive Product", Operating Temperature="-55°C ~ 155°C", Power (Watts)="0.25W, 1/4W", Supplier Device Package=0603, Supplier Part Number 1=A130424CT-ND, Temperature Coefficient=±100ppm/°C, Tolerance=±1%, componentlink1description=Datasheet, componentlink1url=https://www.te.com/commerce/DocumentDelivery/DDEController?Action=srchrtrv&DocNm=9-1773463-9&DocType=DS&DocLang=English, componentlink2description="DigiKey Link", componentlink2url=https://www.digikey.com/en/products/detail/te-connectivity-passive-product/CRGP0603F4K7/8577026, Composition="Thick Film", Features="Pulse Withstanding", Height - Seated (Max)="0.022\" (0.55mm)", lastupdated="2023-03-28 19:29:04", Lifecycle Status=Active, Minimum Order=1, Number of Terminations=2, Package / Case="0603 (1608 Metric)", packaging=TapeAndReel, Part Number=CRGP0603F4K7, Part Status=Active, partid=20883, price=0.02, Resistance="4.7 kOhms", series=CRGP, Size / Dimension="0.063\" L x 0.031\" W (1.60mm x 0.80mm)", Supplier 1=DigiKey
R2 R3 R5: library part SR0603FR-7T1KL, "RES 1K OHM 1% 1/4W 0603", Device Package="0603 (1608 Metric)", manufacturer=Yageo, Operating Temperature="-55°C ~ 155°C", Power (Watts)="0.25W, 1/4W", Ratings=AEC-Q200, Supplier Device Package=0603, Supplier Part Number 1=YAG5829CT-ND, Temperature Coefficient=±100ppm/°C, Tolerance=±1%, componentlink1description=Datasheet, componentlink1url=http://www.yageo.com/documents/recent/PYu-SR_D_F%20tol_RoHS_L_4.pdf, componentlink2description="DigiKey Link", componentlink2url=https://www.digikey.com/en/products/detail/yageo/SR0603FR-7T1KL/9373103, Composition="Thick Film", Features="Automotive AEC-Q200, Pulse Withstanding", Height - Seated (Max)="0.022\" (0.55mm)", lastupdated="2023-03-28 19:29:47", Lifecycle Status=Active, Minimum Order=1, Number of Terminations=2, Package / Case="0603 (1608 Metric)", packaging=TapeAndReel, Part Number=SR0603FR-7T1KL, Part Status=Active, partid=10088, price=0.16, Resistance="1 kOhms", series=SR, Size / Dimension="0.063\" L x 0.031\" W (1.60mm x 0.80mm)", Supplier 1=DigiKey
R6: library part RMCF0603FT22K1, "RES 22.1K OHM 1% 1/10W 0603", Device Package="0603 (1608 Metric)", manufacturer="Stackpole Electronics Inc", Operating Temperature="-55°C ~ 155°C", Power (Watts)="0.1W, 1/10W", Ratings=AEC-Q200, Supplier Device Package=0603, Supplier Part Number 1=RMCF0603FT22K1CT-ND, Temperature Coefficient=±100ppm/°C, Tolerance=±1%, componentlink1description=Datasheet, componentlink1url=https://www.seielect.com/catalog/sei-rmcf_rmcp.pdf, componentlink2description="DigiKey Link", componentlink2url=https://www.digikey.com/en/products/detail/stackpole-electronics-inc/RMCF0603FT22K1/1760764, Composition="Thick Film", Features="Automotive AEC-Q200", Height - Seated (Max)="0.022\" (0.55mm)", lastupdated="2023-03-27 19:26:47", Lifecycle Status=Active, Minimum Order=1, Number of Terminations=2, Package / Case="0603 (1608 Metric)", packaging=CutTape, Part Number=RMCF0603FT22K1, Part Status=Active, partid=6076, price=0.01, Resistance="22.1 kOhms", series=RMCF, Size / Dimension="0.061\" L x 0.031\" W (1.55mm x 0.80mm)", Supplier 1=DigiKey
R7 R10 R19 R20 R21 R26: library part "NA Res 0603", "No resistance, just in case", Manufacturer Part Number=RC0603JR-070RL, Supplier Part Number 1=311-0.0GRCT-ND, Supplier 1=Digi-Key
R8 R9: library part CRCW06031K00FKEB, "RES SMD 1K OHM 1% 1/10W 0603", Device Package="0603 (1608 Metric)", manufacturer="Vishay Dale", Operating Temperature="-55°C ~ 155°C", Power (Watts)="0.1W, 1/10W", Ratings=AEC-Q200, Supplier Device Package=0603, Supplier Part Number 1=541-2985-1-ND, Temperature Coefficient=±100ppm/°C, Tolerance=±1%, componentlink1description=Datasheet, componentlink1url=http://www.vishay.com/docs/20035/dcrcwe3.pdf, componentlink2description="DigiKey Link", componentlink2url=http://digikey.com/product-detail/en/vishay-dale/CRCW06031K00FKEB/541-2985-1-ND/6073628, Composition="Thick Film", Features="Automotive AEC-Q200", Height - Seated (Max)="0.020\" (0.50mm)", lastupdated="2023-03-27 19:26:50", Lifecycle Status=Active, Minimum Order=1, Number of Terminations=2, Package / Case="0603 (1608 Metric)", packaging=CutTape, Part Number=CRCW06031K00FKEB, Part Status=Active, partid=5123, price=0.10, Resistance="1 kOhms", series=CRCW, Size / Dimension="0.063\" L x 0.033\" W (1.60mm x 0.85mm)", Supplier 1=DigiKey
R11: library part RCS060347K0JNEA, "RES SMD 47K OHM 5% 1/4W 0603", Device Package="0603 (1608 Metric)", manufacturer="Vishay Dale", Operating Temperature="-55°C ~ 155°C", Power (Watts)="0.25W, 1/4W", Ratings=AEC-Q200, Supplier Device Package=0603, Supplier Part Number 1=541-2819-1-ND, Temperature Coefficient=±200ppm/°C, Tolerance=±5%, componentlink1description=Datasheet, componentlink1url=http://www.vishay.com/docs/20065/rcse3.pdf, componentlink2description="DigiKey Link", componentlink2url=https://www.digikey.com/en/products/detail/vishay-dale/RCS060347K0JNEA/5866965, Composition="Thick Film", Features="Automotive AEC-Q200, Pulse Withstanding", Height - Seated (Max)="0.020\" (0.50mm)", lastupdated="2023-03-27 19:26:49", Lifecycle Status=Active, Minimum Order=1, Number of Terminations=2, Package / Case="0603 (1608 Metric)", packaging=TapeAndReel, Part Number=RCS060347K0JNEA, Part Status=Active, partid=5445, price=0.02, Resistance="47 kOhms", series="RCS e3", Size / Dimension="0.061\" L x 0.033\" W (1.55mm x 0.85mm)", Supplier 1=DigiKey
R12: library part ESR03EZPF1001, "RES SMD 1K OHM 1% 1/4W 0603", Device Package="0603 (1608 Metric)", manufacturer="Rohm Semiconductor", Operating Temperature="-55°C ~ 155°C", Power (Watts)="0.25W, 1/4W", Ratings=AEC-Q200, Supplier Device Package=0603, Supplier Part Number 1=RHM1.00KADCT-ND, Temperature Coefficient=±100ppm/°C, Tolerance=±1%, componentlink1description=Datasheet, componentlink1url=https://www.rohm.com/datasheet/ESR01MZPF/esr-e, componentlink2description="DigiKey Link", componentlink2url=https://www.digikey.com/en/products/detail/rohm-semiconductor/ESR03EZPF1001/1983428, Composition="Thick Film", Features="Automotive AEC-Q200, Pulse Withstanding", Height - Seated (Max)="0.022\" (0.55mm)", lastupdated="2023-03-27 19:26:49", Lifecycle Status=Active, Minimum Order=1, Number of Terminations=2, Package / Case="0603 (1608 Metric)", packaging=TapeAndReel, Part Number=ESR03EZPF1001, Part Status=Active, partid=5469, price=0.02, Resistance="1 kOhms", series=ESR, Size / Dimension="0.063\" L x 0.031\" W (1.60mm x 0.80mm)", Supplier 1=DigiKey
R13: library part ERJ-3EKF4701V, "RES SMD 4.7K OHM 1% 1/10W 0603", Device Package="0603 (1608 Metric)", manufacturer="Panasonic Electronic Components", Operating Temperature="-55°C ~ 155°C", Power (Watts)="0.1W, 1/10W", Ratings=AEC-Q200, Supplier Device Package=0603, Supplier Part Number 1=P4.70KHCT-ND, Temperature Coefficient=±100ppm/°C, Tolerance=±1%, componentlink1description=Datasheet, componentlink1url=https://industrial.panasonic.com/cdbs/www-data/pdf/RDA0000/AOA0000C304.pdf, componentlink2description="DigiKey Link", componentlink2url=https://www.digikey.com/en/products/detail/panasonic-electronic-components/ERJ-3EKF4701V/1746419, Composition="Thick Film", Features="Automotive AEC-Q200", Height - Seated (Max)="0.022\" (0.55mm)", lastupdated="2023-03-27 19:26:48", Lifecycle Status=Active, Minimum Order=1, Number of Terminations=2, Package / Case="0603 (1608 Metric)", packaging=TapeAndReel, Part Number=ERJ-3EKF4701V, Part Status=Active, partid=5645, price=0.01, Resistance="4.7 kOhms", series=ERJ-3EK, Size / Dimension="0.063\" L x 0.031\" W (1.60mm x 0.80mm)", Supplier 1=DigiKey
R14 R15 R16: library part ESR03EZPF4700, "RES SMD 470 OHM 1% 1/4W 0603", Device Package="0603 (1608 Metric)", manufacturer="Rohm Semiconductor", Operating Temperature="-55°C ~ 155°C", Power (Watts)="0.25W, 1/4W", Ratings=AEC-Q200, Supplier Device Package=0603, Supplier Part Number 1=RHM470ADCT-ND, Temperature Coefficient=±100ppm/°C, Tolerance=±1%, componentlink1description=Datasheet, componentlink1url=https://www.rohm.com/datasheet/ESR01MZPF/esr-e, componentlink2description="DigiKey Link", componentlink2url=https://www.digikey.com/en/products/detail/rohm-semiconductor/ESR03EZPF4700/1983445, Composition="Thick Film", Features="Automotive AEC-Q200, Pulse Withstanding", Height - Seated (Max)="0.022\" (0.55mm)", lastupdated="2023-03-27 19:25:41", Lifecycle Status=Active, Minimum Order=1, Number of Terminations=2, Package / Case="0603 (1608 Metric)", packaging=TapeAndReel, Part Number=ESR03EZPF4700, Part Status=Active, partid=25101, price=0.02, Resistance="470 Ohms", series=ESR, Size / Dimension="0.063\" L x 0.031\" W (1.60mm x 0.80mm)", Supplier 1=DigiKey
R17 R18 R24: library part ESR03EZPF1002, "RES SMD 10K OHM 1% 1/4W 0603", Device Package="0603 (1608 Metric)", manufacturer="Rohm Semiconductor", Operating Temperature="-55°C ~ 155°C", Power (Watts)="0.25W, 1/4W", Ratings=AEC-Q200, Supplier Device Package=0603, Supplier Part Number 1=RHM10KADCT-ND, Temperature Coefficient=±100ppm/°C, Tolerance=±1%, componentlink1description=Datasheet, componentlink1url=https://www.rohm.com/datasheet/ESR01MZPF/esr-e, componentlink2description="DigiKey Link", componentlink2url=https://www.digikey.com/en/products/detail/rohm-semiconductor/ESR03EZPF1002/1983429, Composition="Thick Film", Features="Automotive AEC-Q200, Pulse Withstanding", Height - Seated (Max)="0.022\" (0.55mm)", lastupdated="2023-03-27 19:26:49", Lifecycle Status=Active, Minimum Order=1, Number of Terminations=2, Package / Case="0603 (1608 Metric)", packaging=TapeAndReel, Part Number=ESR03EZPF1002, Part Status=Active, partid=5466, price=0.02, Resistance="10 kOhms", series=ESR, Size / Dimension="0.063\" L x 0.031\" W (1.60mm x 0.80mm)", Supplier 1=DigiKey
R22: library part CMP-025-000081-3, "POT TH 10K OHM", Color=Black, manufacturer=Bourns, Manufacturer Part Number=3352H-1-103LF, Max Operating Temperature=125°C, Max Power Dissipation=500mW, Min Operating Temperature=-55°C, Package Quantity=100, Resistance=10kR, Temperature Coefficient=100ppm/°C, Tolerance=20%, Voltage Rating=250V, componentlink1description=https://www.bourns.com/docs/Product-Datasheets/3352.pdf, componentlink1url=https://www.bourns.com/docs/Product-Datasheets/3352.pdf, componentlink2description=http://www.bourns.com/data/global/pdfs/3352.pdf, componentlink2url=http://www.bourns.com/data/global/pdfs/3352.pdf, ComponentLink3Description=https://www.alliedelec.com/m/d/548cca4a953cb1966bc498efd0327bf6.pdf, ComponentLink3URL=https://www.alliedelec.com/m/d/548cca4a953cb1966bc498efd0327bf6.pdf, ComponentLink4Description=http://components.arrow.com/part/dataview/41630340S9469265N1506, ComponentLink4URL=http://components.arrow.com/part/dataview/41630340S9469265N1506, Composition=Cermet, Contact Plating=Matte,Tin, Depth=7.62mm, Design Item ID="POT 10K", Diameter=8.89mm, Height=0.15inch, Lead Free="Lead Free", Length=8.89mm, Military Standard=Not, Mount="PCB,Through Hole", Number of Turns=1, packaging=Bulk, Power Rating=500mW, Pricing 1="1=1.85, 10=1.624, 25=1.456, 50=1.4, 100=1.344, 250=1.288, 500=1.064, 1000=1.008, 5000=0.84 (USD)", Radiation Hardening=No, Source=IC_Res.SchLib, Stock 1=402, Taper=Linear, Termination=Pin, Tri=10000, Weight=0.01oz
R23 R25: library part RCS0603100KFKEA, "RES SMD 100K OHM 1% 1/4W 0603", Device Package="0603 (1608 Metric)", manufacturer="Vishay Dale", Operating Temperature="-55°C ~ 155°C", Power (Watts)="0.25W, 1/4W", Ratings=AEC-Q200, Supplier Device Package=0603, Supplier Part Number 1=541-2800-1-ND, Temperature Coefficient=±100ppm/°C, Tolerance=±1%, componentlink1description=Datasheet, componentlink1url=http://www.vishay.com/docs/20065/rcse3.pdf, componentlink2description="DigiKey Link", componentlink2url=https://www.digikey.com/en/products/detail/vishay-dale/RCS0603100KFKEA/5866946, Composition="Thick Film", Features="Automotive AEC-Q200, Pulse Withstanding", Height - Seated (Max)="0.020\" (0.50mm)", lastupdated="2023-03-27 19:26:49", Lifecycle Status=Active, Minimum Order=1, Number of Terminations=2, Package / Case="0603 (1608 Metric)", packaging=TapeAndReel, Part Number=RCS0603100KFKEA, Part Status=Active, partid=5363, price=0.02, Resistance="100 kOhms", series="RCS e3", Size / Dimension="0.061\" L x 0.033\" W (1.55mm x 0.85mm)", Supplier 1=DigiKey
R27 R28: library part SR0603FR-7T10KL, "RES 10K OHM 1% 1/4W 0603", Device Package="0603 (1608 Metric)", manufacturer=Yageo, Operating Temperature="-55°C ~ 155°C", Power (Watts)="0.25W, 1/4W", Ratings=AEC-Q200, Supplier Device Package=0603, Supplier Part Number 1=YAG5823CT-ND, Temperature Coefficient=±100ppm/°C, Tolerance=±1%, componentlink1description=Datasheet, componentlink1url=http://www.yageo.com/documents/recent/PYu-SR_D_F%20tol_RoHS_L_4.pdf, componentlink2description="DigiKey Link", componentlink2url=https://www.digikey.com/en/products/detail/yageo/SR0603FR-7T10KL/9373097, Composition="Thick Film", Features="Automotive AEC-Q200, Pulse Withstanding", Height - Seated (Max)="0.022\" (0.55mm)", lastupdated="2023-03-28 19:29:18", Lifecycle Status=Active, Minimum Order=1, Number of Terminations=2, Package / Case="0603 (1608 Metric)", packaging=TapeAndReel, Part Number=SR0603FR-7T10KL, Part Status=Active, partid=17590, price=0.16, Resistance="10 kOhms", series=SR, Size / Dimension="0.063\" L x 0.031\" W (1.60mm x 0.80mm)", Supplier 1=DigiKey
S1: library part CMP-039-000008-6, "Dip Switch SPST 4 Position Surface Mount Slide (Standard) Actuator 25mA 24VDC", Manufacturer Part Number 1=DS04-254-2-04BK-SMT, Design Item ID="Switch SLIDE SPDT 4 pos", Source=IC_Component.SchLib
S2 S3: "SWITCH TACTILE SPST-NO 50MA 32V", Contact Rating @ Voltage="0.05A @ 32VDC", manufacturer=C&K, Operating Force=400gf, Operating Temperature="-40°C ~ 85°C", Supplier Part Number 1=CKN10688CT-ND, Actuator Height off PCB, Vertical=2.50mm, Actuator Orientation="Top Actuated", Actuator Type=Standard, Circuit=SPST-NO, componentlink1description=Datasheet, componentlink1url=https://dznh3ojzb2azq.cloudfront.net/products/Tactile/KMR7/documents/datasheet.pdf, componentlink2description="DigiKey Link", componentlink2url=http://digikey.com/product-detail/en/c-k/KMR741NG-ULC-LFS/CKN10688CT-ND/6035360, Illumination=Non-Illuminated, Ingress Protection="IP67 - Dust Tight, Waterproof", lastupdated="2020-04-09 10:01:05", Lifecycle Status=Active, Minimum Order=1, Mounting Type="Surface Mount", Outline="4.20mm x 2.80mm", packaging=TapeAndReel, Part Number="KMR741NG ULC LFS", Part Status=Active, price=0.16, series=KMR7, Supplier 1=DigiKey, Switch Function=Off-Mom, Termination Style="Gull Wing"
U1: "RFID Transponder IC 13.56MHz ISO 14443, NFC I²C 2.7V ~ 5.5V 8-SOIC (0.154\", 3.90mm Width)", Supplier Part Number 1=511-M24SR64-YMN6T/2, Manufacturer Part Number=M24SR64-YMN6T/2, Supplier 1=Mouser
U2: library part CMP-00080-3, "USB Interface IC USBXpress - USB to UART Bridge QFN24", manufacturer="Silicon Labs", Manufacturer Part Number=CP2102N-A02-GQFN24, Supplier Part Number 1=336-5888-1-ND, Component Type=Interface, Manufacturer Part Number 1=CP2102N-A02-GQFN24, Supplier 1=Digi-Key
U4: library part CMP-035-000005-3, "IC REG LINEAR 5V 1.5A DPAK", Manufacturer Part Number=L7805CDT-TR, Design Item ID="LDO 5V 1.5A", Source=IC_Component.SchLib, Supplier=Digi-Key